# Altium PCB PCB1.PcbDoc (part 1 of 3)
Units mil, origin at the board's own origin, x right, y up, seen from the top; angles counter-clockwise.
Board outline 970.61 x 1495 mil, 4 copper layers (Top Layer, Mid-Layer 1, Mid-Layer 2, Bottom Layer); 18 components, 0 nets, 96 pads, 58 vias.
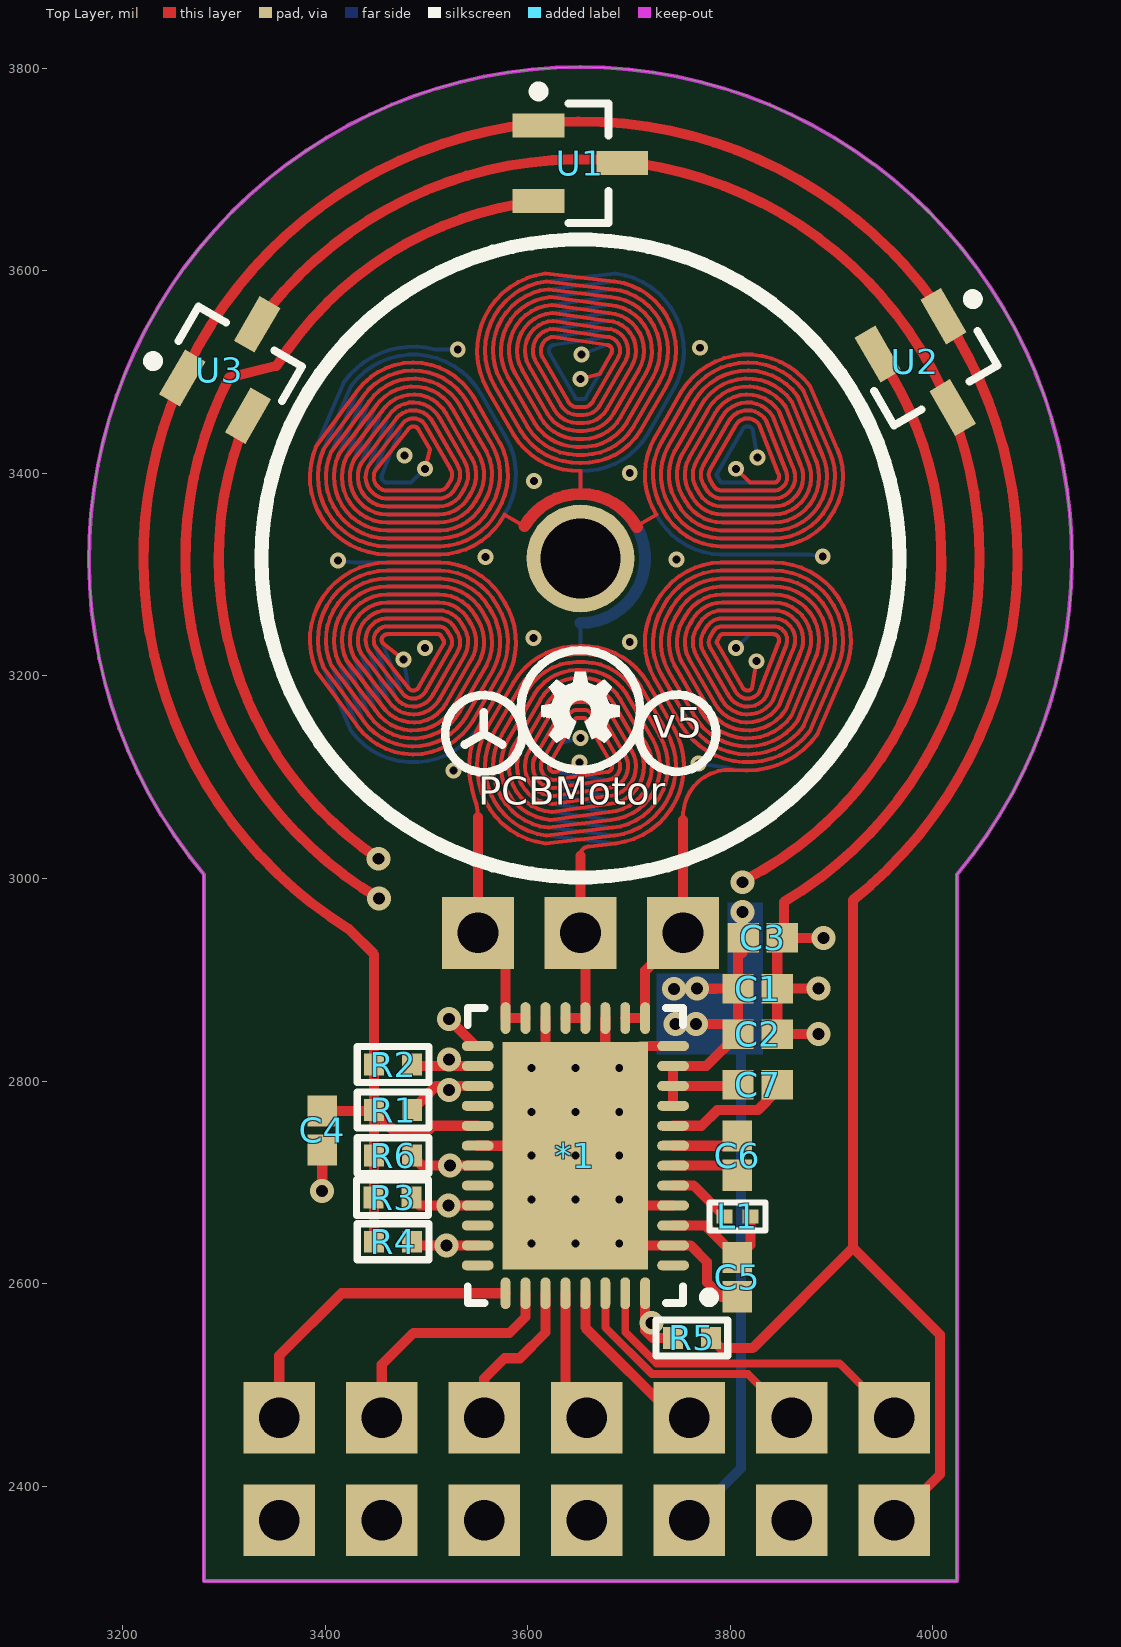
[diagram p0: Top Layer view]
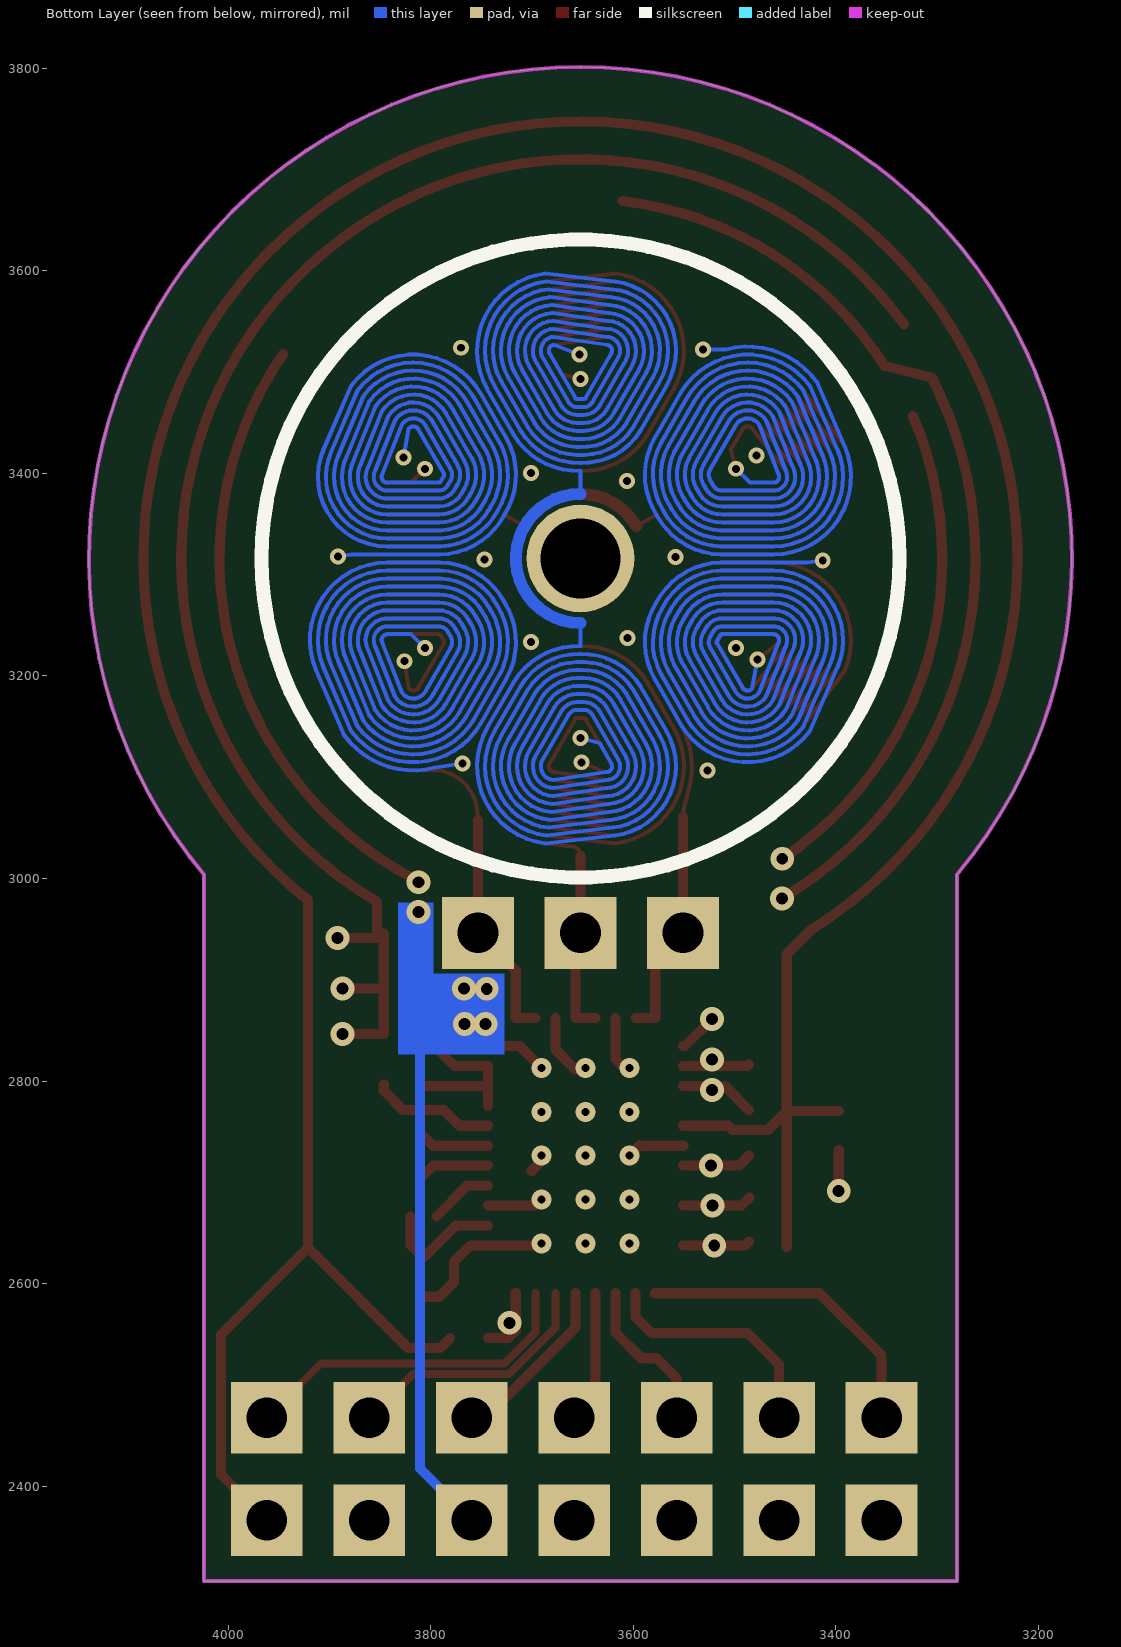
[diagram p1: Bottom Layer view, seen from below]
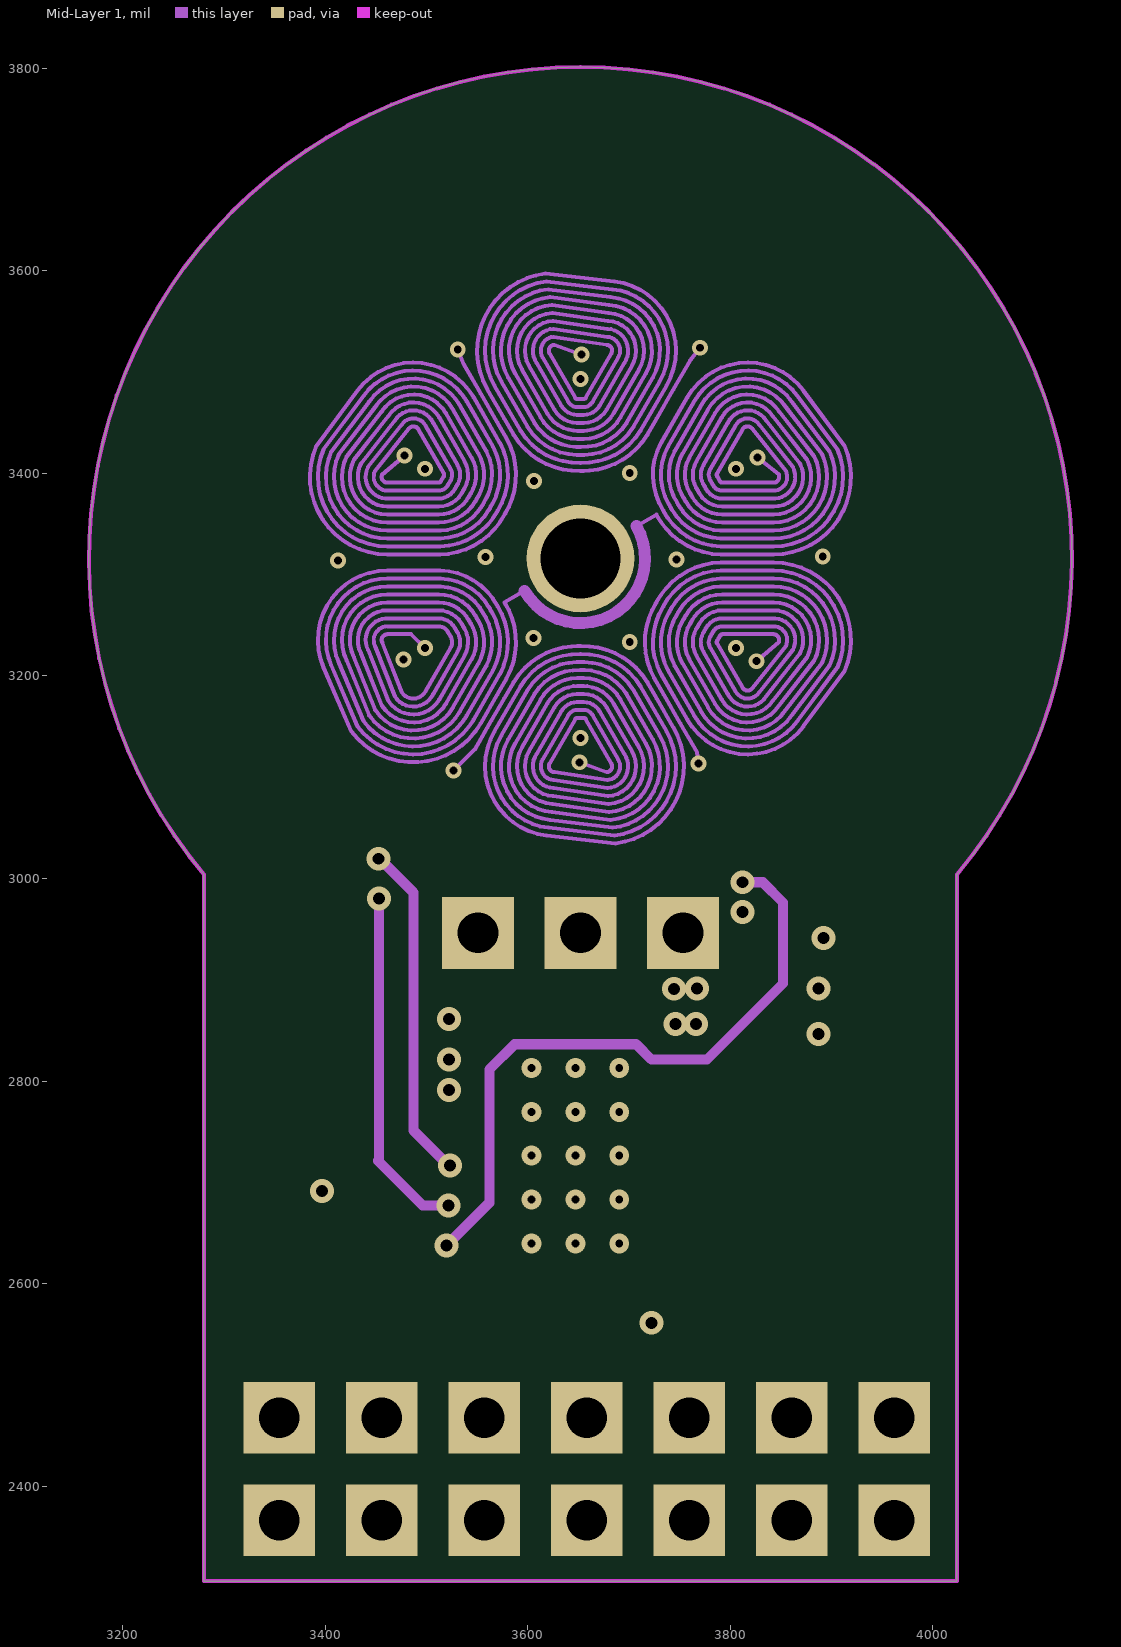
[diagram p2: Mid-Layer 1]
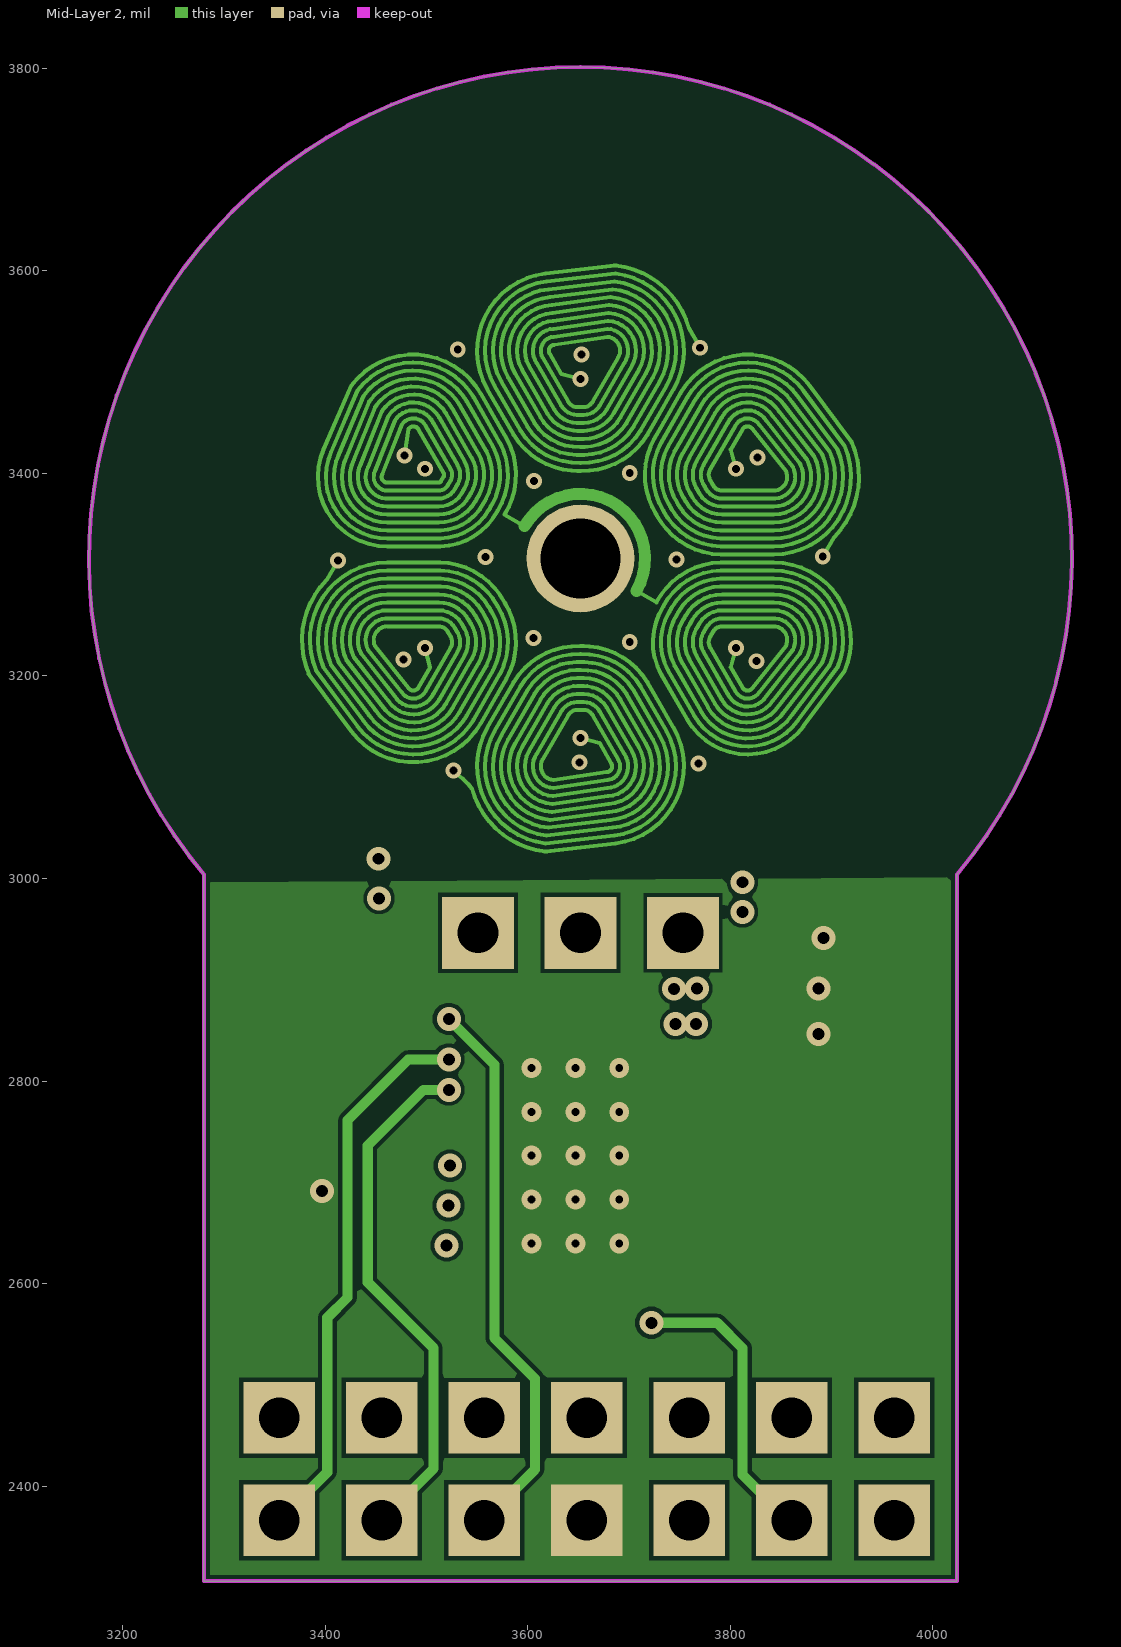
[diagram p3: Mid-Layer 2]

## Layer stack, top to bottom
Top Solder: solder mask 0.4, Solder Resist, Dk 3.5
Top Layer: signal copper 1.4
Dielectric 1: dielectric 12.6, FR-4, Dk 4.8
Mid-Layer 1: signal copper 1.4
Dielectric3: dielectric 12.6, FR-4, Dk 4.8
Mid-Layer 2: signal copper 1.4
Dielectric2: dielectric 12.6, FR-4, Dk 4.8
Bottom Layer: signal copper 1.4
Bottom Solder: solder mask 0.4, Solder Resist, Dk 3.5

## Board outline
3280.24,2306.27 4023.79,2306.27 4023.79,3004 ccw(c3652.01,3315.95) 3280.24,3004

## Design rules (kind name [scope] priority, off if disabled: settings)
Clearance [All] p1: gap=10 ignorepadtopadclearanceinfootprint=FALSE except(0: Arc-Hole Track-Hole SMDPad-Hole THPad-Hole Via-Hole Fill-Hole Poly-Hole Region-Hole Text-Hole)
PolygonConnect [All] p1: connectstyle=Relief reliefconductorwidth=10 reliefentries=4 polygonreliefangle="90 Angle" airgapwidth=10
RoutingVias [All] p1: holewidth=28 width=50 viastyle="Through Hole" minholewidth=28 minwidth=50 maxholewidth=28 maxwidth=50
SolderMaskExpansion [All] p1: expansion=4 istentingtop=FALSE
Width [All] p1: maxlimit=10 minlimit=10 preferedwidth=10
30 further rules are at their usual default settings.

## Components (designator, comment, footprint, x,y, rotation, side; value= is the part's Value field where it differs from the comment)
*1 "MCT8316Z0RRGFR" MCF8315A 3647.01,2726.27 r180 top
C1 "22uF" CAPC1005X56X25ML10T15 3827.01,2891.27 r180 top
C2 "100nF" CAPC1005X56X25ML10T15 3827.01,2846.27 r180 top
C3 "10nF" CAPC1005X56X25ML10T15 3832.01,2941.27 r180 top
C4 "1uF" CAPC1005X56X25ML10T15 3397.01,2751.27 r90 top
C5 "22uF" CAPC1005X56X25ML10T15 3807.01,2606.27 r270 top
C6 "10nF" CAPC1005X56X25ML10T15 3807.01,2726.27 r270 top
C7 "1uF" CAPC1005X56X25ML10T15 3827.01,2796.27 r180 top
L1 "47uH" RESC0603X02N 3807.01,2666.27 r180 top
R1 "5.1k" RESC1005X03N 3467.01,2771.27 r180 top
R2 "5.1k" RESC1005X03N 3467.01,2816.27 r180 top
R3 "10k" RESC1005X03N 3466.44,2684.86 r180 top
R4 "10k" RESC1005X03N 3467.01,2641.27 r180 top
R5 "10k" RESC1005X03N 3762.01,2546.27 r0 top
R6 "10k" RESC1005X03N 3467.01,2726.27 r180 top
U1 "DRV5015A3QDBZR" SOT95P237X95-3N 3652.01,3706.27 r0 top
U2 "DRV5015A3QDBZR" SOT95P237X95-3N 3998.73,3500.78 r300 top
U3 "DRV5015A3QDBZR" SOT95P237X95-3N 3312.01,3511.27 r60 top

## Footprints (in the part's own frame and the unit in brackets; to place one, negate y for a bottom-side part, rotate by r counter-clockwise, add the part's x,y. Pads: shape width x height; smd on the part's side, far side on the other; paste and mask are expansions set on the pad)
CAPC1005X56X25ML10T15 [mm] "Chip Capacitor, 2-Leads, Body 1.00x0.50mm, IPC Low Density"
  rect 0.78x0.74 smd: 1(-0.49,0) 2(0.49,0)
  body extent -0.55,-0.3 0.55,0.3, height 0.56
MCF8315A [mm] "QFN, 40-Leads, Body 5.00x7.00mm, Pitch 0.50mm, Thermal Pad 3.65x5.70mm, IPC Medium Density"
  oval 0.8x0.25 smd: 1(-2.45,2.75) 2(-2.45,2.25) 3(-2.45,1.75) 4(-2.45,1.25) 5(-2.45,0.75) 6(-2.45,0.25) 7(-2.45,-0.25) 8(-2.45,-0.75) 9(-2.45,-1.25) 10(-2.45,-1.75) 11(-2.45,-2.25) 12(-2.45,-2.75) 21(2.45,-2.75) 22(2.45,-2.25) 23(2.45,-1.75) 24(2.45,-1.25) 25(2.45,-0.75) 26(2.45,-0.25) 27(2.45,0.25) 28(2.45,0.75) 29(2.45,1.25) 30(2.45,1.75) 31(2.45,2.25) 32(2.45,2.75)
  oval 0.25x0.8 smd: 13(-1.75,-3.45) 14(-1.25,-3.45) 15(-0.75,-3.45) 16(-0.25,-3.45) 17(0.25,-3.45) 18(0.75,-3.45) 19(1.25,-3.45) 20(1.75,-3.45) 33(1.75,3.45) 34(1.25,3.45) 35(0.75,3.45) 36(0.25,3.45) 37(-0.25,3.45) 38(-0.75,3.45) 39(-1.25,3.45) 40(-1.75,3.45)
  rect 3.65x5.7 smd: 41(0,0)
  silkscreen extent -3.48,-3.7 2.7,3.7, body extent -2.55,-3.55 2.55,3.55, height 1
RESC0603X02N [mm] "Chip Resistor, 2-Leads, Body 0.60x0.30mm, IPC Medium Density"
  rect 0.4x0.35 smd: 1(-0.325,0) 2(0.325,0)
  silkscreen extent -0.7,-0.35 0.7,0.35, body extent -0.3,-0.15 0.3,0.15, height 0.23
RESC1005X03N [mm] "Chip Resistor, 2-Leads, Body 1.00x0.50mm, IPC Medium Density"
  rect 0.5x0.55 smd: 1(-0.475,0) 2(0.475,0)
  silkscreen extent -0.9,-0.45 0.9,0.45, body extent -0.5,-0.25 0.5,0.25, height 0.3
SOT95P237X95-3N [mm] "SOT23, 3-Leads, Body 2.92x2.37mm, Pitch 0.95mm, IPC Medium Density"
  rect 1.3x0.6 smd: 1(-1.05,0.95) 2(-1.05,-0.95) 3(1.05,0)
  silkscreen extent -1.17,-1.5 0.7,1.92, body extent -0.7,-1.52 0.7,1.52, height 0.95

## Part data
*1: library part MCF8315A
C1: library part CMP-2008-02800-1, "'LMK105BJ225MV-F", Manufacturer="AVX Interconnect / Elco", Part Number=0402YC104KAT2A
C2 C3 C4 C5 C6 C7: library part CMP-2008-02799-1, "'04025C103MAT2A", Manufacturer="AVX Interconnect / Elco", Part Number=0402YC103MAT2A
L1: library part IND
R1 R2 R3 R4 R5 R6: library part RES

## Free pads (board coordinates)
  rect 70.87x70.87 hole 40.16: ""(3354.65,2366.27) ""(3354.65,2467.46) ""(3455.83,2366.27) ""(3455.83,2467.46) ""(3550.83,2946.27) ""(3557.01,2366.27) ""(3557.01,2467.46) ""(3652.01,2946.27) ""(3658.19,2366.27) ""(3658.19,2467.46) ""(3753.19,2946.27) ""(3759.38,2366.27) ""(3759.38,2467.46) ""(3860.56,2366.27) ""(3860.56,2467.46) ""(3961.74,2366.27) ""(3961.74,2467.46)
  round 106.3 hole 78.74: ""(3652.01,3315.95)

## Via types
v1: diameter 15.75, hole 7.87, Top Layer to Bottom Layer, tented both sides, 24 vias
v2: diameter 23.62, hole 11.81, Top Layer to Bottom Layer, tented both sides, 19 vias
v3: diameter 19.68, hole 7.87, Top Layer to Bottom Layer, 15 vias

## Nets (pads, with @x,y where several pads share a name; then routed paths per layer and width w, separated by ;. In a path a pad name is that pad's centre, name@x,y a point inside that pad or via, vN(x,y) a via of type N, cw(c..) or ccw(c..) an arc to the next point about the centre after c; other vN are vias at no path point)
pads on no net: *1.1 *1.2 *1.3 *1.4 *1.5 *1.6 *1.7 *1.8 *1.9 *1.10 *1.11 *1.12 *1.13 *1.14 *1.15 *1.16 *1.17 *1.18 *1.19 *1.20 *1.21 *1.22 *1.23 *1.24 *1.25 *1.26 *1.27 *1.28 *1.29 *1.30 *1.31 *1.32 *1.33 *1.34 *1.35 *1.36 *1.37 *1.38 *1.39 *1.40 *1.41 C1.1 C1.2 C2.1 C2.2 C3.1 C3.2 C4.1 C4.2 C5.1 C5.2 C6.1 C6.2 C7.1 C7.2 L1.1 L1.2 R1.1 R1.2 R2.1 R2.2 R3.1 R3.2 R4.1 R4.2 R5.1 R5.2 R6.1 R6.2 U1.1 U1.2 U1.3 U2.1 U2.2 U2.3 U3.1 U3.2 U3.3